# Altium PCB Arduino Cape.PcbDoc
Units mm, origin at the board's own origin, x right, y up, seen from the top; angles counter-clockwise.
Board outline 85 x 56.2 mm, 2 copper layers (Top Layer, Bottom Layer), stack 1.601 mm thick; 42 components, 53 nets, 199 pads, 77 vias.
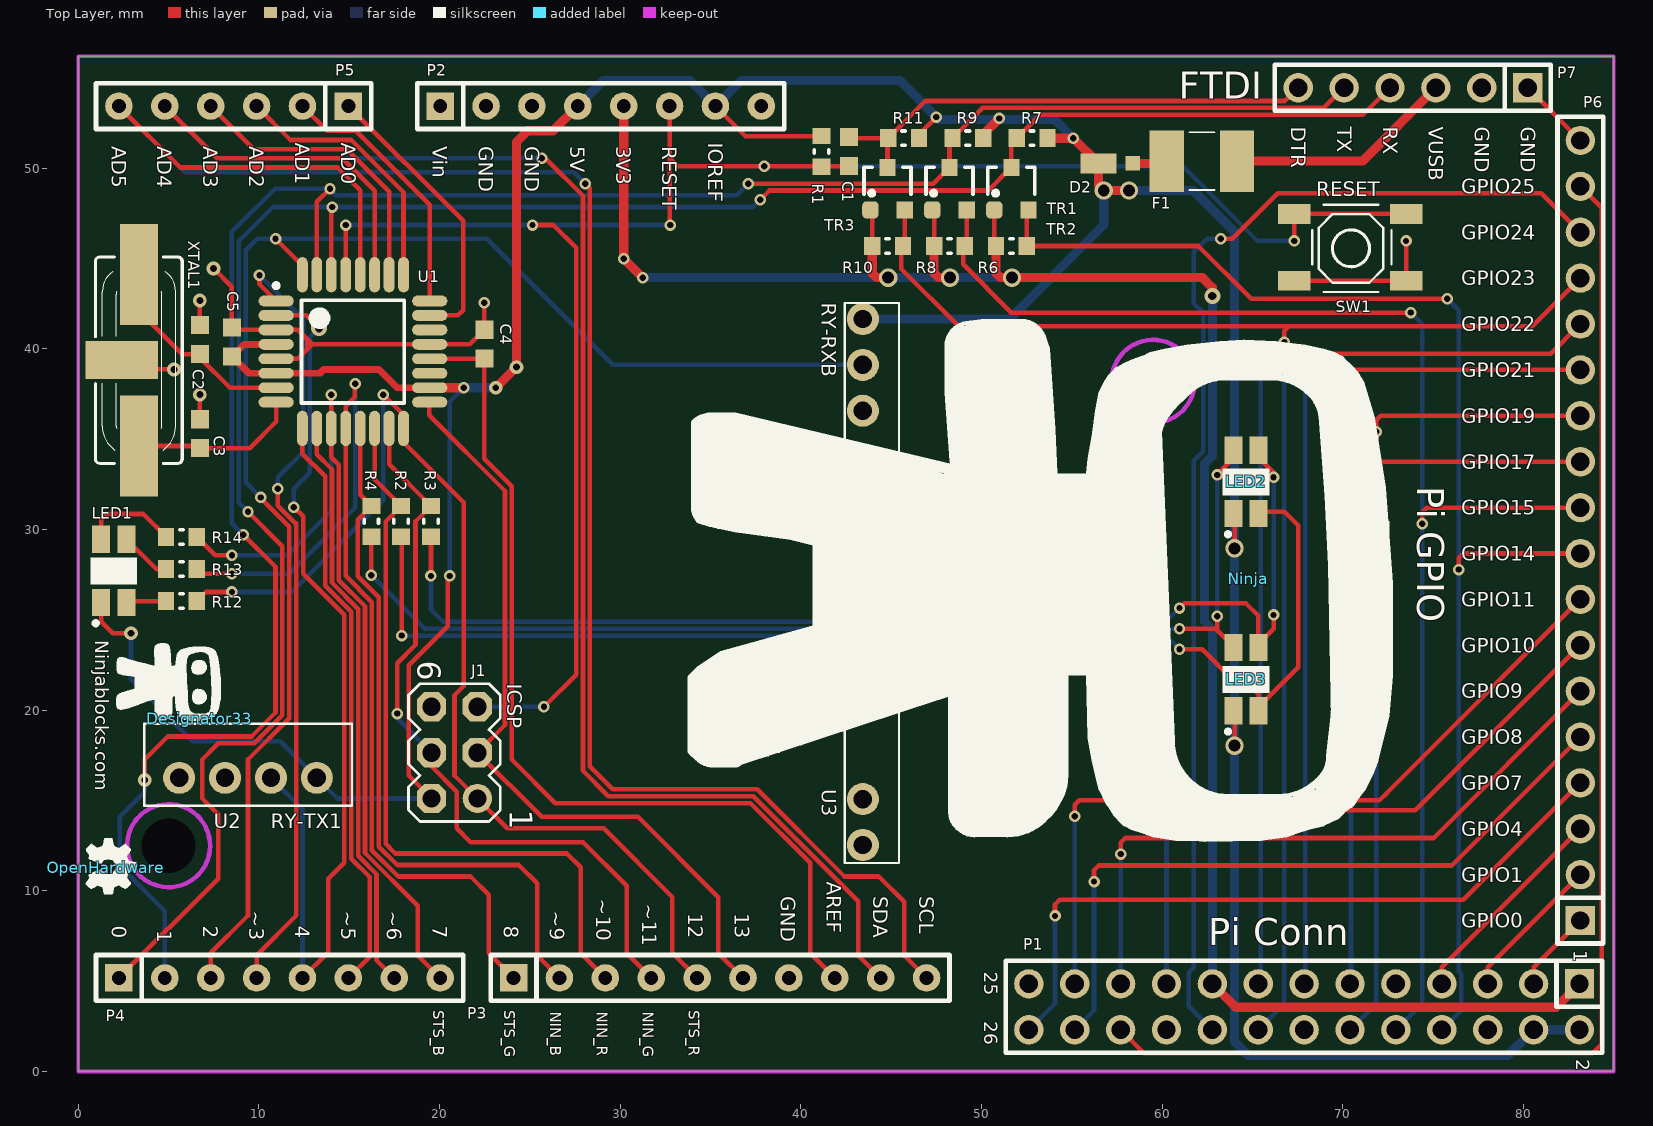
[diagram p0: Top Layer view]
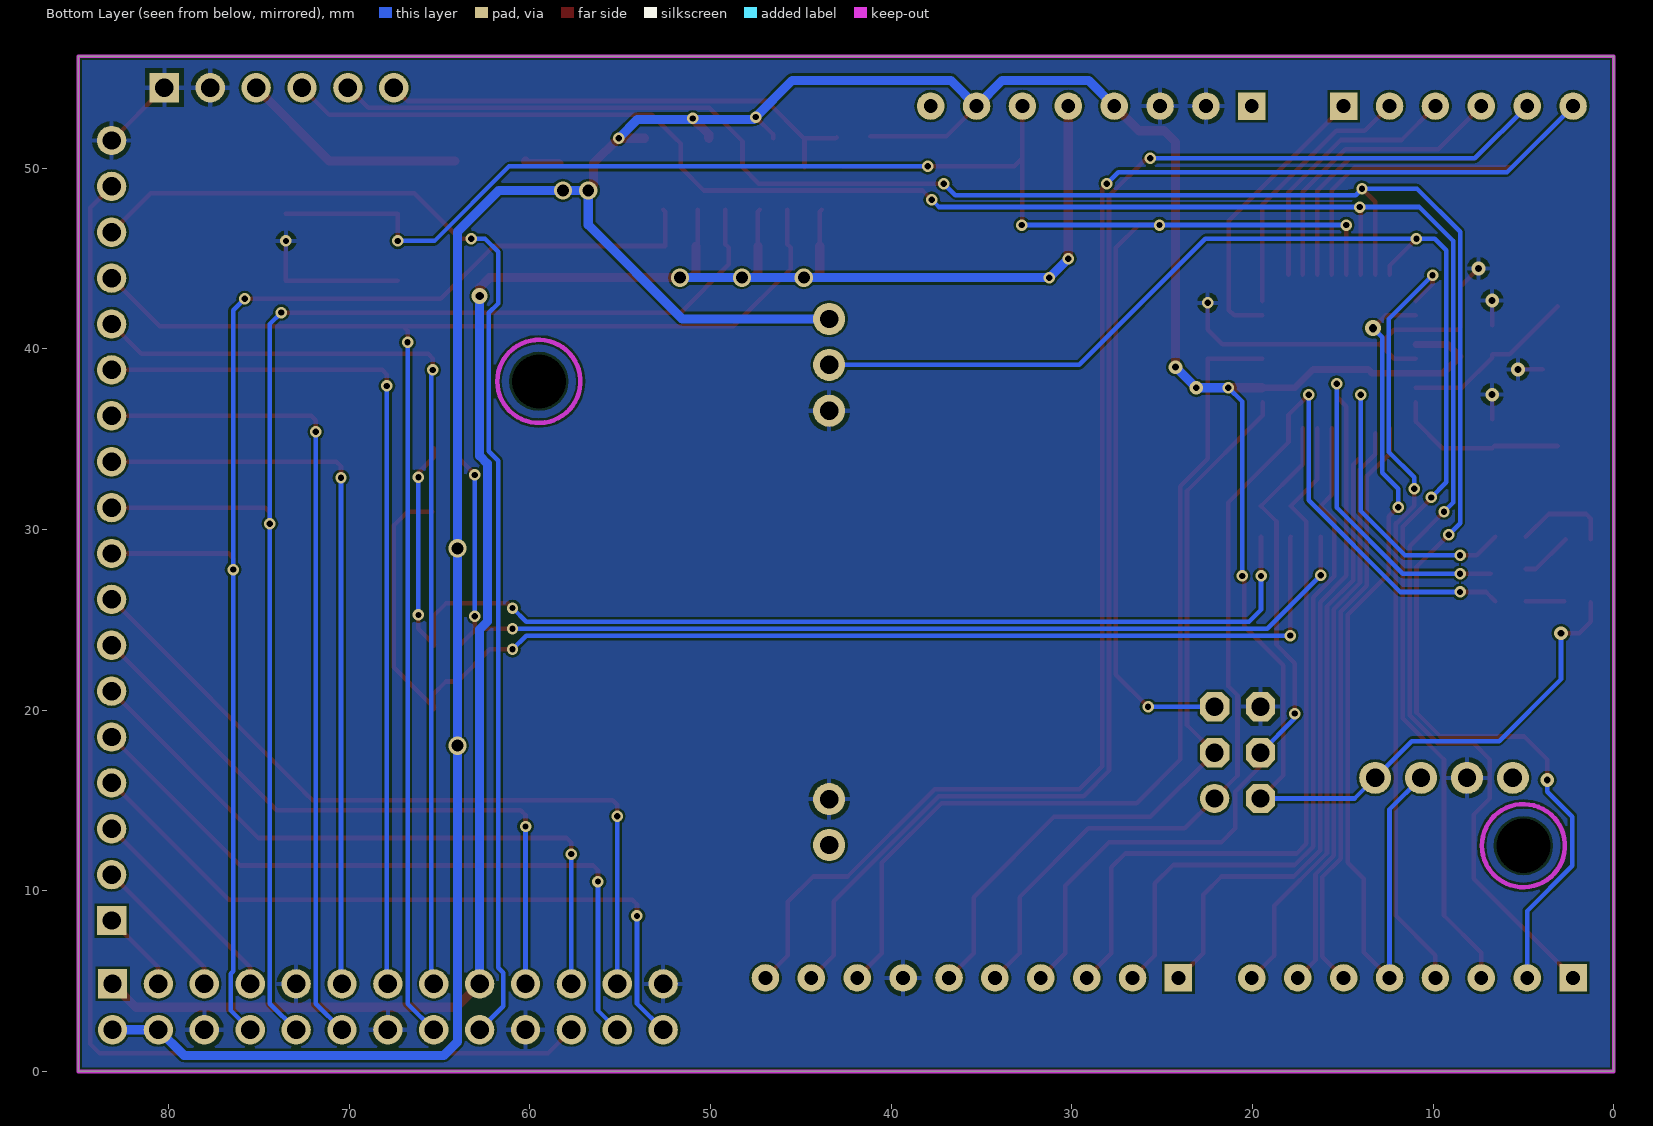
[diagram p1: Bottom Layer view, seen from below]

## Layer stack, top to bottom
Top Layer: signal copper 0.0356
Dielectric: core 1.53, FR-4, Dk 4.8
Bottom Layer: signal copper 0.0356

## Board outline
0,0 0,56.2 85,56.2 85,0

## Design rules (kind name [scope] priority, off if disabled: settings)
Clearance [All] p1: gap=0.127
HoleSize [All] p1: absolutevalues=TRUE maxlimit=3.048 minlimit=0.152 maxpercent=80.000 minpercent=20.000
MinimumSolderMaskSliver [All] p1: minsoldermaskwidth=0.173
PolygonConnect [All] p1: connectstyle=Relief reliefconductorwidth=0.254 reliefentries=4 polygonreliefangle="90 Angle" airgapwidth=0.254
RoutingVias [All] p1: holewidth=0.711 width=1.27 viastyle="Through Hole" minholewidth=0.711 minwidth=1.27 maxholewidth=0.711 maxwidth=1.27
SilkToSilkClearance [All] p1: silktosilkclearance=0.127
SilkToSolderMaskClearance SilkscreenOverComponentPads_Ninja [InComponent('Ninja')] p1: minsilkscreentomaskgap=0 clearancetoexposedcopper=TRUE
SilkToSolderMaskClearance SilkscreenOverComponentPads [IsPad] p2: minsilkscreentomaskgap=0.152 clearancetoexposedcopper=TRUE
SolderMaskExpansion [All] p1: expansion=0.102
Width [All] p1: maxlimit=1.016 minlimit=0.076 preferedwidth=0.127
24 further rules are at their usual default settings.

## Components (designator, comment, footprint, x,y, rotation, side; value= is the part's Value field where it differs from the comment)
C1 "100nF" CAPC1608N 42.672,50.927 r270 top
C2 "22p" CAPC1608N 6.731,40.513 r270 top
C3 "22p" CAPC1608N 6.731,35.306 r270 top
C4 "100nF" CAPC1608N 22.479,40.259 r270 top
C5 "100nF" CAPC1608N 8.509,40.386 r90 top
D2 "MSS1P2U" MICROSMP 56.483,50.265 r0 top
Designator33 "Comment" NinjaBlocks 6.731,19.558 r270 top
F1 "500mA" L1812 62.198,50.392 r180 top
J1 "HEADER" MA03-2 20.828,17.653 r90 top
LED1 "RGB LED" AVAGO_RGB_LED 1.967,27.714 r270 top
LED2 "RGB LED" AVAGO_RGB_LED 64.643,32.639 r270 top
LED3 "RGB LED" AVAGO_RGB_LED 64.643,21.717 r270 top
Ninja "Ninja_Logo_LRG" NinjaBlocks_LRG 64.77,27.305 r270 top
OpenHardware "OpenHardware_logo" OPENHARDWARE_LOGO 1.524,11.303 r270 top
P1 "Pi" SIP13X.2 83.1,4.85 r270 top
P2 "RECEPT" "Header 8x1 8.5mm" 20.034,53.44 r0 top
P3 "RECEPT" "Header 10x1 8.5mm" 24.098,5.18 r0 top
P4 "RECEPT" "Header 8x1 8.5mm" 2.254,5.18 r0 top
P5 "RECEPT" "Header 6x1 8.5mm" 14.954,53.44 r180 top
P6 "RECEPT" SIP18X.1 83.153,8.355 r270 top
P7 "HEADER" SIP6X.1 80.232,54.456 r270 top
R1 "10k" RESC1608N 41.148,50.927 r90 top
R2 "330R" RESC1608N 17.875,30.453 r270 top
R3 "330R" RESC1608N 19.526,30.453 r270 top
R4 "150R" RESC1608N 16.224,30.453 r90 top
R6 "10k" RESC1608N 51.657,45.693 r180 top
R7 "10k" RESC1608N 52.8,51.662 r0 top
R8 "10k" RESC1608N 48.228,45.693 r180 top
R9 "10k" RESC1608N 49.244,51.662 r0 top
R10 "10k" RESC1608N 44.799,45.693 r180 top
R11 "10k" RESC1608N 45.688,51.662 r0 top
R12 "330R" RESC1608N 5.715,26.035 r180 top
R13 "330R" RESC1608N 5.715,27.813 r180 top
R14 "150R" RESC1608N 5.715,29.591 r0 top
SW1 "SKQGADE010" ALPS_SMD_TAC_SWITCH 73.501,47.471 r180 top
TR1 "BSS138LT3G" SOT-23 51.657,48.868 r0 top
TR2 "BSS138LT3G" SOT-23 48.228,48.868 r0 top
TR3 "BSS138LT3G" SOT-23 44.799,48.868 r0 top
U1 "ATMEGA328P" 32A_M 15.208,39.851 r0 top
U2 "RY-TX1" TX1 5.588,16.256 r0 top
U3 "RY-RXB" RXB8 43.434,17.526 r270 top
XTAL1 "16.384MHz" HC49US-G 2.413,32.385 r270 top

## Footprints (in the part's own frame and the unit in brackets; to place one, negate y for a bottom-side part, rotate by r counter-clockwise, add the part's x,y. Pads: shape width x height; smd on the part's side, far side on the other; paste and mask are expansions set on the pad)
32A_M [mm] "Thin QFP, 32-Leads, Body 7x7mm, Pitch 0.8mm, IPC Low Density"
  oval 1.95x0.6 smd: 1(-4.25,2.8) 2(-4.25,2) 3(-4.25,1.2) 4(-4.25,0.4) 5(-4.25,-0.4) 6(-4.25,-1.2) 7(-4.25,-2) 8(-4.25,-2.8) 17(4.25,-2.8) 18(4.25,-2) 19(4.25,-1.2) 20(4.25,-0.4) 21(4.25,0.4) 22(4.25,1.2) 23(4.25,2) 24(4.25,2.8)
  oval 0.6x1.95 smd: 9(-2.8,-4.25) 10(-2,-4.25) 11(-1.2,-4.25) 12(-0.4,-4.25) 13(0.4,-4.25) 14(1.2,-4.25) 15(2,-4.25) 16(2.8,-4.25) 25(2.8,4.25) 26(2,4.25) 27(1.2,4.25) 28(0.4,4.25) 29(-0.4,4.25) 30(-1.2,4.25) 31(-2,4.25) 32(-2.8,4.25)
  silkscreen extent -4.37,-2.85 2.85,3.77, body extent -3.5,-3.5 3.5,3.5, height 1.2
ALPS_SMD_TAC_SWITCH [mm]
  rect 1.8x1.1 smd: 1(0,3.7) 2(6.2,3.7) 3(0,0) 4(6.2,0)
  silkscreen extent 0.8,-0.51 5.2,4.32
AVAGO_RGB_LED [mm]
  rect 1.5x1 smd: 1(1.75,-0.7) 2(1.75,0.7) 3(-1.75,0.7) 4(-1.75,-0.7)
  silkscreen extent -0.74,-1.3 3,1.3
CAPC1608N [mm] "Chip Capacitor, Body 1.6x0.8mm, IPC Medium Density"
  rect 1x1 smd: 1(-0.8,0) 2(0.8,0)
  body extent -0.87,-0.48 0.87,0.48, height 0.85
HC49US-G [mm]
  rect 5.6x2.1 smd: 1(-11.74,0.95) 3(-2.24,0.95)
  rect 2.1x4 smd: 2(-6.99,0)
  silkscreen extent -12.71,-1.46 -1.27,3.36
"Header 6x1 8.5mm" [mil] "Stackable 6 pin header"
  rect 60x60 hole 30: 1(0,0)
  round 60 hole 30: 2(100,0) 3(200,0) 4(300,0) 5(400,0) 6(500,0)
  silkscreen extent -50,-50 550,50, body extent -50,-50 550,50, height 335
"Header 8x1 8.5mm" [mil] "Stackable 8 pin header"
  rect 60x60 hole 30: 1(0,0)
  round 60 hole 30: 2(100,0) 3(200,0) 4(300,0) 5(400,0) 6(500,0) 7(600,0) 8(700,0)
  silkscreen extent -50,-50 750,50, body extent -50,-50 750,50, height 335
"Header 10x1 8.5mm" [mil] "Stackable 10 pin header"
  rect 60x60 hole 30: 1(0,0)
  round 60 hole 30: 2(100,0) 3(200,0) 4(300,0) 5(400,0) 6(500,0) 7(600,0) 8(700,0) 9(800,0) 10(900,0)
  silkscreen extent -50,-50 950,50, body extent -50,-50 950,50, height 335
L1812 [mm]
  rect 1.9x3.4 smd: 1(-1.95,0) 2(1.95,0)
  silkscreen extent -0.7,-1.6 0.7,1.6
MA03-2 [mil]
  round 64 hole 40: 1(-100,-50)
  oct 64x64 hole 40: 2(-100,50) 3(0,-50) 4(0,50) 5(100,-50) 6(100,50)
  silkscreen extent -150,-100 150,100
MICROSMP [mm]
  rect 0.8x0.8 smd: 1(1.9,0)
  rect 2x1.1 smd: 2(0,0)
NinjaBlocks [mm]
  silkscreen extent -4.16,-4.62 0.16,1.17
NinjaBlocks_LRG [mm]
  silkscreen extent -14.33,-31.02 14.52,7.99
OPENHARDWARE_LOGO [mm]
  silkscreen extent -1.6,-1.07 1.5,1.68
RESC1608N [mm] "Chip Resistor, Body 1.6x0.8mm, IPC Medium Density"
  rect 0.9x1 smd: 1(-0.85,0) 2(0.85,0)
  silkscreen extent -0.1,-0.4 0.1,0.4, body extent -0.85,-0.48 0.85,0.48, height 0.6
RXB8 [mil]
  round 70 hole 40: 1(-950,0) 2(-850,0) 3(-750,0) 4(96.46,0) 5(196.46,0)
  silkscreen extent -985,-39 236,79
SIP6X.1 [mil]
  rect 64x64 hole 40: 1(0,0)
  round 64 hole 40: 2(0,-100) 3(0,-200) 4(0,-300) 5(0,-400) 6(0,-500)
  silkscreen extent -50,-551 50,50
SIP13X.2 [mil]
  rect 64x64 hole 40: 1(0,0)
  round 64 hole 40: 2(100,0) 3(0,-100) 4(100,-100) 5(0,-200) 6(100,-200) 7(0,-300) 8(100,-300) 9(0,-400) 10(100,-400) 11(0,-500) 12(100,-500) 13(0,-600) 14(100,-600) 15(0,-700) 16(100,-700) 17(0,-800) 18(100,-800) 19(0,-900) 20(100,-900) 21(0,-1000) 22(100,-1000) 23(0,-1100) 24(100,-1100) 25(0,-1200) 26(100,-1200)
  silkscreen extent -50,-1250 150,50
SIP18X.1 [mil]
  rect 64x64 hole 40: 1(0,0)
  round 64 hole 40: 2(-100,0) 3(-200,0) 4(-300,0) 5(-400,0) 6(-500,0) 7(-600,0) 8(-700,0) 9(-800,0) 10(-900,0) 11(-1000,0) 12(-1100,0) 13(-1200,0) 14(-1300,0) 15(-1400,0) 16(-1500,0) 17(-1600,0) 18(-1700,0)
  silkscreen extent -1752,-50 50,50
SOT-23 [mm] "SOT-23; 3 Leads; Body 3.1 x 2.5 mm, inc. leads (LxW max)"
  rrect50% 0.9x0.95 smd: 1(-0.95,-1.175)
  rect 0.9x0.95 smd: 2(0.95,-1.175) 3(0,1.175)
  silkscreen extent -1.3,-0.37 1.3,1.18, body extent -1.53,-0.75 1.58,0.75, height 1.1
TX1 [mil]
  round 70 hole 40: 1(0,0) 2(100,0) 3(200,0) 4(300,0)
  silkscreen extent -76,-61 377,118

## Part data
C1 C4 C5: library part 1088, "CAP 100nF CER 50V 10% X7R 0603 SMD"
C2 C3: library part 2235, "CAP CER 22PF 5% 50V NP0 0603"
D2: library part 4286, "DIODE SCHOTTKY MSS1P2U 20V 1A"
F1: library part 4288, "PTC RESETTABLE 1812L050PR 15V 500mA 1812"
J1: library part 4300, "CONN HEADER 2 row 6pos 2.54mm spacing Vertical TH"
LED1 LED2 LED3: library part 4289, "LED HSMF-C118 20mA RGB SMD"
OpenHardware: "Open Hardware Logo"
P1: library part 4280
P2 P4: library part 4298, "CONN RECEPT Female 8pos 2.54mm spacing Vertical TH"
P3: library part 4297, "CONN RECEPT Female 10pos 2.54mm spacing Vertical TH"
P5: library part 4299, "CONN RECEPT Female 6pos 2.54mm spacing Vertical TH"
P6: library part 4302, "CONN RECEPT Female 18pos 2.54mm spacing Vertical TH"
P7: library part 4016, "CONN HEADER FTDI Connector 6pos 2.54mm spacing Vertical TH HDR1X6"
R1 R6 R7 R8 R9 R10 R11: library part 1382, "RES 10k OHM 1/10W 1% 0603 SMD"
R2 R3 R12 R13: library part 2087, "RES 330 OHM 1/10W 1% 0603 SMD"
R4 R14: library part 4119, "RES 150 OHM 0.1W 1% 0603 SMD"
SW1: library part 4290, "Switch Tactile SKQGADE010 SPST SMD"
TR1 TR2 TR3: library part 4287, "MOSFET N BSS138LT3G 50V 200mA SOT-23"
U1: library part 4292, "IC MCU ATMEGA328P 32K FLASH 32TQFP"
U2: library part 4294, "Module RF RY-TX1 Transmitting Module Through-hole"
U3: library part 4293, "Module RF RY-RXB Receiving Module Through-hole"
XTAL1: library part 4291, "XTAL 16.384MHz 18pF +/-20ppm tol HC49/USSMD"

## Free pads (board coordinates)
  round 2 hole 3 unplated: 0(5,12.5)
  round 0 hole 3 unplated: ""(59.5,38.2)

## Via types
v1: diameter 0.635, hole 0.35, Top Layer to Bottom Layer, 60 vias
v2: diameter 0.762, hole 0.381, Top Layer to Bottom Layer, 8 vias
v3: diameter 1.016, hole 0.66, Top Layer to Bottom Layer, 7 vias
v4: diameter 0.889, hole 0.457, Top Layer to Bottom Layer, 2 vias

## Nets (pads, with @x,y where several pads share a name; then routed paths per layer and width w, separated by ;. In a path a pad name is that pad's centre, name@x,y a point inside that pad or via, vN(x,y) a via of type N, cw(c..) or ccw(c..) an arc to the next point about the centre after c; other vN are vias at no path point)
3V3: P1.1 P1.17 P2.5 R6.2 R8.2 R10.2 TR1.1 TR2.1 TR3.1 | length 116.9
  Top Layer w0.254: TR3.1 43.949,47.593 R10.2 ; TR2.1 47.378,47.593 R8.2 ; R6.2@50.707,45.793 TR1.1
  Top Layer w0.508: P2.5 v1(30.194,44.99) v1(31.242,43.942) ; R10.2 43.949,44.189 44.196,43.942 v3(44.831,43.942) ; R8.2 47.378,44.189 47.625,43.942 v3(48.26,43.942) ; R6.2 50.807,44.189 51.054,43.942 v3(51.689,43.942) 62.23,43.942 62.78,43.392 v4(62.78,42.926) ; P1.17 64.074,3.556 81.806,3.556 P1.1
  Bottom Layer w0.508: v1(30.194,44.99) v1(31.242,43.942) v3(44.831,43.942) v3(48.26,43.942) v3(51.689,43.942) ; P1.17 62.78,24.473 62.351,24.903 62.351,33.649 62.78,34.078 v4(62.78,42.926)
5V: C5.1 D2.2 J1.2 LED1.1 LED2.1 LED3.1 P1.2 P1.4 P2.4 P2.7 R1.2 R7.2 R9.2 R11.2 U1.4 U1.6 U1.18 U2.4 U3.1 | length 228.9
  Top Layer w0.254: LED1.1 1.267,24.895 1.905,24.257 2.667,24.257 v2@2.921,24.511 ; J1.2 18.288,16.383 18.288,22.479 20.447,24.638 20.447,27.305 v1(20.574,27.432) ; P2.7 36.937,51.777 R1.2 ; R11.2 46.538,51.872 v1(47.498,52.832) ; R9.2 R9.2@50.138,51.662 ; v3@63.849,29.31 v3@63.905,29.366 ; LED3.1@63.911,20.067 64.008,19.97 v3(64.008,18.034) ; LED2.1@63.911,30.989 64.008,30.892 v3(64.008,28.956)
  Top Layer w0.381: U1.4 9.174,40.251 C5.1 9.444,38.651 U1.6 13.378,38.651 13.589,38.862 16.637,38.862 17.648,37.851 U1.18
  Top Layer w0.508: U1.18 v1(21.336,37.851) ; v2(23.114,37.846) v2(24.257,38.989) 24.257,51.435 24.892,52.07 26.284,52.07 P2.4 ; R9.2 50.094,51.872 v1(50.978,52.756) ; R7.2 v1(55.086,51.662) D2.2 56.483,49.054 v3(56.769,48.768) v3(58.166,48.768)
  Bottom Layer w0.254: v2(2.921,24.257) 2.921,21.717 6.35,18.288 11.176,18.288 U2.4 14.351,15.113 J1.2 ; v1(20.574,27.432) 20.574,37.089 v1(21.336,37.851)
  Bottom Layer w0.508: v1(21.336,37.851) 23.119,37.851 v2(24.257,38.989) ; P2.4 29.078,54.864 33.85,54.864 P2.7 36.698,54.864 45.466,54.864 v1(47.498,52.832) 47.625,52.705 54.043,52.705 v1(55.086,51.662) ; U3.1 51.562,41.656 56.769,46.863 v3(56.769,48.768) v3(58.166,48.768) 61.722,48.768 64.008,46.482 v3(64.008,28.956) v3(64.008,18.034) 64.008,1.651 64.77,0.889 79.139,0.889 P1.4 P1.2
AD0: P5.1 U1.23 | length 15.9
  Top Layer w0.254: P5.1 21.304,47.09 21.304,42.137 21.018,41.851 U1.23
AD1: P5.2 U1.24 | length 14.6
  Top Layer w0.254: P5.2 13.784,52.07 15.367,52.07 19.458,47.979 U1.24
AD2: P5.3 U1.25 | length 14.7
  Top Layer w0.254: P5.3 11.752,51.562 15.113,51.562 18.008,48.667 U1.25
AD3: P5.4 U1.26 | length 16.4
  Top Layer w0.254: P5.4 9.72,51.054 14.859,51.054 17.208,48.705 U1.26
AREF: C4.2 P3.8 U1.20 | length 51.7
  Top Layer w0.254: U1.20 19.466,39.459 C4.2 22.479,33.909 24.003,32.385 24.003,17.272 26.416,14.859 37.211,14.859 40.513,11.557 40.513,6.545 P3.8
B2_LED: P4.8 R14.2 U1.11 | length 50.1
  Top Layer w0.254: R14.2 7.581,28.575 v1(8.509,28.575) ; v1(14.008,37.465) U1.11 14.008,33.998 14.427,33.579 14.427,27.203 15.875,25.755 15.875,12.096 18.796,9.175 18.796,6.418 P4.8
  Bottom Layer w0.254: v1(8.509,28.575) 11.557,28.575 14.008,31.026 v1(14.008,37.465)
B_LED: P3.2 R4.2 U1.13 | length 39.6
  Top Layer w0.254: U1.13 15.608,31.919 R4.2 15.47,30.549 15.47,27.41 16.637,26.243 16.637,12.446 17.653,11.43 24.384,11.43 25.4,10.414 25.4,6.418 P3.2
DTR: C1.1 P7.6 R11.1 TR3.3 | length 27.3
  Top Layer w0.254: C1.1@43.021,51.7 43.059,51.662 R11.1 ; TR3.3 44.799,51.623 R11.1 ; P7.6 66.797,53.721 46.897,53.721 R11.1
G2_LED: P3.1 R13.1 U1.12 | length 56.2
  Top Layer w0.254: R13.1@6.819,27.559 v1(8.509,27.559) ; v1@15.316,38.049 15.316,37.338 14.808,36.83 U1.12 14.808,27.432 16.256,25.984 16.256,12.254 17.715,10.795 21.717,10.795 22.733,9.779 22.733,6.545 P3.1
  Bottom Layer w0.254: v1(8.509,27.559) 11.684,27.559 15.342,31.217 v1(15.342,38.075)
G_LED: J1.4 P3.4 R3.1 U1.15 | length 41.6
  Top Layer w0.254: U1.15 17.208,33.621 R3.1 18.669,30.446 18.669,23.622 17.653,22.606 v1(17.653,19.812) ; J1.4 19.558,16.891 20.955,15.494 20.955,13.462 21.717,12.7 27.94,12.7 30.353,10.287 30.353,6.545 P3.4
  Bottom Layer w0.254: v1(17.653,19.812) 17.653,19.558 J1.4
GND: C2.1 C3.1 C4.1 C5.2 J1.6 P1.6 P1.9 P1.14 P1.20 P1.25 P2.2 P2.3 P3.7 P6.18 P7.1 P7.2 SW1.1 SW1.2 U1.3 U1.5 U1.21 U2.2 U3.3 U3.4 XTAL1.2 | length 38.8
  Top Layer w0.254: XTAL1.2@3.937,38.862 v2(5.296,38.862) ; C3.1 v2(6.731,37.465) ; C2.1 v2(6.731,42.672) ; v2(7.493,44.45) 8.509,43.434 C5.2 8.644,41.051 U1.3 12.162,41.051 12.962,40.251 ; U1.5 12.162,39.451 12.962,40.251 ; v1(22.479,42.545) C4.1 21.671,40.251 U1.21 12.962,40.251 ; SW1.2 SW1.1 v1(73.501,45.974) ; P7.1 P6.18
GPIO0: P1.3 P6.1 | length 4.6
  Top Layer w0.254: P1.3 80.56,5.762 P6.1
GPIO1: P1.5 P6.2 | length 8.2
  Top Layer w0.254: P1.5 78.02,5.762 P6.2
GPIO4: P1.7 P6.3 | length 11.8
  Top Layer w0.254: P1.7 75.48,5.762 P6.3
GPIO7: P1.26 P6.4 | length 39.4
  Top Layer w0.254: v1(54.07,8.609) 54.07,9.244 54.324,9.498 76.676,9.498 P6.4
  Bottom Layer w0.254: P1.26 54.07,3.76 v1(54.07,8.609)
GPIO8: P1.24 P6.5 | length 39.3
  Top Layer w0.254: v1(56.229,10.514) 56.229,11.149 56.483,11.403 76.041,11.403 P6.5
  Bottom Layer w0.254: P1.24 56.229,3.379 v1(56.229,10.514)
GPIO9: P1.21 P6.6 | length 36.7
  Top Layer w0.254: v1(57.7,12.038) 57.7,12.673 57.954,12.927 75.025,12.927 P6.6
  Bottom Layer w0.254: P1.21 v1(57.7,12.038)
GPIO10: P1.19 P6.7 | length 35.9
  Top Layer w0.254: v1(60.24,13.562) 60.24,14.197 60.494,14.451 74.009,14.451 P6.7
  Bottom Layer w0.254: P1.19 v1@60.24,13.308
GPIO11: P1.23 P6.8 | length 43.3
  Top Layer w0.254: v1(55.16,14.123) 55.16,14.758 55.414,15.012 72.03,15.012 ; 72.485,15.467 72.03,15.012 ; P6.8 72.03,15.012
  Bottom Layer w0.254: P1.23 v1(55.16,14.123)
GPIO17: P1.11 P6.11 | length 41.5
  Top Layer w0.254: v1(70.453,32.866) 70.453,33.501 70.707,33.755 P6.11
  Bottom Layer w0.254: P1.11 70.453,4.903 v1(70.453,32.866)
GPIO18: P1.12 P6.12 | length 45.7
  Top Layer w0.254: v1(71.85,35.406) 71.85,36.041 72.104,36.295 P6.12
  Bottom Layer w0.254: P1.12 71.85,3.76 v1(71.85,35.406)
GPIO21: P1.13 P6.13 | length 49.1
  Top Layer w0.254: v1(67.913,37.946) 67.913,38.581 68.167,38.835 P6.13
  Bottom Layer w0.254: P1.13 67.913,4.903 v1(67.913,37.946)
GPIO22: P1.15 P6.14 | length 53.6
  Top Layer w0.254: v1(65.373,38.835) 65.373,39.47 65.627,39.724 81.502,39.724 P6.14
  Bottom Layer w0.254: P1.15 P1.15@65.468,4.998 ; v1(65.373,38.835) 65.468,38.74 P1.15@65.468,4.998 ; P1.15@65.659,5.189 P1.15@65.468,4.998
GPIO24: P1.18 P6.16 | length 67.8
  Top Layer w0.254: v1(63.246,46.101) 63.881,46.101 66.394,48.614 80.994,48.614 P6.16
  Bottom Layer w0.254: P1.18 61.468,3.622 61.468,5.461 61.754,5.747 61.754,33.814 62.272,34.332 62.272,41.995 61.754,42.513 61.754,45.371 62.484,46.101 v1(63.246,46.101)
GPIO25: P1.22 P6.17 | length 75.6
  Top Layer w0.254: P1.22 58.994,1.016 83.82,1.016 84.328,1.524 84.328,47.82 P6.17
  Bottom Layer w0.254: P1.22 P1.22@57.7,2.582
LV_DTR: P1.16 P6.15 R10.1 TR3.2 | length 83
  Top Layer w0.254: TR3.2 45.749,45.793 R10.1 45.561,45.605 45.561,44.423 48.736,41.248 67.024,41.248 ; v1(66.77,40.359) 66.77,40.994 67.024,41.248 ; P6.15 80.486,41.248 67.024,41.248
  Bottom Layer w0.254: P1.16 66.77,3.76 v1(66.77,40.359)
NetC2_2: C2.2 U1.7 XTAL1.1 | length 9.8
  Top Layer w0.254: XTAL1.1@3.109,42.357 5.753,39.713 C2.2 6.731,39.515 8.4,37.846 U1.7@10.958,37.846
NetC3_2: C3.2 U1.8 XTAL1.3 | length 9.4
  Top Layer w0.254: XTAL1.3@3.109,34.625 C3.2@6.604,34.625 ; C3.2 9.487,34.506 10.958,35.977 U1.8
NetD2_1: D2.1 F1.2 | length 1.9
  Top Layer w0.508: D2.1 60.121,50.265 F1.2
NetLED1_2: LED1.2 R12.2 | length 2.1
  Top Layer w0.254: LED1.2@2.738,26.035 R12.2
NetLED1_3: LED1.3 R13.2 | length 2.9
  Top Layer w0.254: LED1.3 4.318,27.813 R13.2
NetLED1_4: LED1.4 R14.1 | length 5.4
  Top Layer w0.254: LED1.4 1.267,30.604 1.524,30.861 3.595,30.861 R14.1
NetLED2_2: LED2.2 LED3.2 R2.2 | length 68.7
  Top Layer w0.254: R2.2 17.907,29.571 v1(17.907,24.13) ; v1(60.96,23.368) 62.219,23.368 63.997,21.59 64.643,21.59 65.343,20.89 LED3.2@65.343,20.186 ; LED3.2@65.305,20.148 LED3.2@65.311,20.154 ; LED3.2@65.311,20.067 LED3.2@65.311,20.154 ; LED3.2@65.311,20.276 LED3.2@65.311,20.154 ; LED3.2@65.343,20.094 LED3.2@65.343,20.186 ; LED2.2@65.405,30.988 66.77,30.988 67.532,30.226 67.532,22.375 LED3.2@65.343,20.186 ; LED3.2@65.311,20.154 LED3.2@65.343,20.186
  Bottom Layer w0.254: v1(17.907,24.13) 60.198,24.13 v1(60.96,23.368)
NetLED2_3: LED2.3 LED3.3 R3.2 | length 64.5
  Top Layer w0.254: v1(19.526,27.432) R3.2 ; v1(60.96,25.654) 61.214,25.908 64.643,25.908 65.311,25.24 LED3.3@65.311,23.654 ; LED3.3@65.305,23.648 LED3.3@65.311,23.654 ; LED3.3@65.311,23.567 LED3.3@65.311,23.654 ; LED2.3@65.311,34.489 65.311,34.003 66.167,33.147 v1(66.167,32.893) ; v1(66.167,25.273) 66.167,24.51 LED3.3@65.311,23.654
  Bottom Layer w0.254: 19.526,26.956 v1(19.526,27.432) 19.526,25.559 20.193,24.892 60.198,24.892 v1(60.96,25.654) ; v1(66.167,25.273) v1(66.167,32.893)
NetLED2_4: LED2.4 LED3.4 R4.1 | length 61.5
  Top Layer w0.254: v1(16.224,27.464) R4.1 ; v1(60.96,24.511) 62.967,24.511 63.049,24.429 ; v1(63.049,25.192) 63.049,24.429 ; v1@63.246,32.893 63.222,32.893 63.049,33.066 LED2.4@63.905,33.922 ; LED3.4@63.905,23.573 63.049,24.429
  Bottom Layer w0.254: v1(16.224,27.464) 19.177,24.511 v1(60.96,24.511) ; v1(63.049,25.192) v1(63.049,33.02)
PD3: P4.4 U1.1 | length 43.6
  Top Layer w0.254: P4.4 9.874,6.445 12.065,8.636 12.065,30.353 12.019,30.353 11.049,31.323 v1(11.049,32.258) ; v1(10.033,44.069) 10.033,43.576 U1.1
  Bottom Layer w0.254: v1(10.033,44.069) 12.446,41.656 12.446,34.29 11.049,32.893 v1(11.049,32.258)
PD5: P4.6 U1.9 | length 32.4
  Top Layer w0.254: U1.9 12.408,34.201 13.665,32.944 13.665,26.887 15.113,25.439 15.113,11.78 16.129,10.764 16.129,6.355 P4.6
PD6: P4.7 U1.10 | length 32.3
  Top Layer w0.254: U1.10@13.208,35.34 13.208,34.163 14.046,33.325 14.046,27.045 15.494,25.597 15.494,11.938 16.51,10.922 16.51,6.164 P4.7 P4.7@17.172,5.18
PI_RXD: P1.10 P6.10 R8.1 TR2.2 | length 79
  Top Layer w0.254: TR2.2 49.178,45.793 R8.1 48.99,45.605 48.99,44.677 51.657,42.01 v1(73.755,42.01) ; v1(74.39,30.326) 74.39,30.961 74.644,31.215 P6.10
  Bottom Layer w0.254: P1.10 74.39,3.76 v1(74.39,30.326) 74.39,41.375 v1(73.755,42.01)
PI_TXD: P1.8 P6.9 R6.1 TR1.2 | length 75.2
  Top Layer w0.254: TR1.2 52.507,47.593 R6.1 62.003,45.693 64.924,42.772 v1(75.787,42.772) ; v1(76.422,27.786) 76.422,28.421 76.676,28.675 P6.9
  Bottom Layer w0.254: P1.8 76.547,3.377 76.547,5.417 76.422,5.542 v1(76.422,27.786) 76.422,42.137 v1(75.787,42.772)
R2_LED: J1.1 P3.5 R12.1 U1.16 | length 61.5
  Top Layer w0.254: R12.1 7.073,26.543 v1(8.509,26.543) ; v1(16.891,37.465) 18.008,36.348 U1.16 18.008,34.824 21.336,31.496 21.336,21.336 20.828,20.828 20.828,16.383 J1.1 23.749,13.462 29.083,13.462 32.893,9.652 32.893,6.545 P3.5
  Bottom Layer w0.254: v1(8.509,26.543) 11.811,26.543 16.891,31.623 v1(16.891,37.465)
R_LED: P3.3 R2.1 U1.14 | length 42
  Top Layer w0.254: U1.14 16.408,32.77 R2.1 17.018,30.446 17.018,12.604 17.557,12.065 27.051,12.065 27.813,11.303 27.813,6.545 P3.3
RESET: C1.2 J1.5 P2.6 R1.1 SW1.3 SW1.4 U1.29 | length 108.7
  Top Layer w0.254: U1.29 v1(14.808,46.855) ; v1(25.146,46.855) 26.297,46.855 27.559,45.593 27.559,21.971 v1(25.781,20.193) ; v1@32.734,46.863 32.734,50.546 ; P2.6 32.734,50.546 ; C1.2@42.672,50.1 v1(37.973,50.1) 33.18,50.1 32.734,50.546 ; v1(67.31,45.974) 67.31,47.462 SW1.4 SW1.3
  Bottom Layer w0.254: v1(14.808,46.855) v1(32.766,46.855) ; J1.5 v1(25.781,20.193) ; v1@38.227,50.1 61.152,50.1 65.278,45.974 v1(67.31,45.974)
RFA: P4.3 U1.32 U3.2 | length 83
  Top Layer w0.254: P4.3 7.334,6.572 9.398,8.636 9.398,17.272 11.684,19.558 11.684,30.149 10.109,31.724 v1(10.109,31.775) ; v1(10.922,46.101) 12.408,44.615 U1.32
  Bottom Layer w0.254: v1(10.109,31.775) 9.271,32.614 9.271,45.466 9.906,46.101 v1(10.922,46.101) 22.606,46.101 29.591,39.116 U3.2
RFB: P4.5 U1.2 U2.3 | length 53.1
  Top Layer w0.254: U1.2 12.632,41.851 v4(13.335,41.148) ; v1(11.938,31.242) 12.446,30.734 12.446,27.559 14.732,25.273 14.732,11.557 13.843,10.668 13.843,6.609 P4.5
  Bottom Layer w0.254: U2.3 12.414,14.51 P4.5 ; v1(11.938,31.242) 11.938,32.258 12.827,33.147 12.827,40.64 v4(13.335,41.148)
RX: P4.1 P7.4 R7.1 TR1.3 U1.30 | length 119.2
  Top Layer w0.254: P4.1 7.747,10.673 7.747,14.224 6.858,15.113 6.858,17.272 7.747,18.161 9.748,18.161 11.303,19.716 11.303,29.083 v1(9.398,30.988) ; U1.30 14.008,47.795 v1(14.065,47.852) ; v1(37.759,48.26) 38.267,48.768 50.382,48.768 TR1.3 51.657,51.369 R7.1 53.247,52.959 71.115,52.959 P7.4
  Bottom Layer w0.254: v1(9.398,30.988) 8.89,31.496 8.89,45.974 10.768,47.852 v1(14.065,47.852) 37.351,47.852 v1(37.759,48.26)
SCK: J1.3 P3.6 U1.17 | length 43.5
  Top Layer w0.254: U1.17@19.431,37.051 19.431,36.322 23.622,32.131 23.622,19.177 J1.3 25.654,14.097 30.988,14.097 35.433,9.652 35.433,6.545 P3.6
SCL: P3.10 P5.6 U1.28 | length 105.8
  Top Layer w0.254: P5.6 5.656,50.038 14.351,50.038 15.608,48.781 U1.28 ; v1(28.067,49.149) 28.321,48.895 28.321,16.891 29.591,15.621 37.592,15.621 42.418,10.795 44.323,10.795 45.72,9.398 45.72,6.418 P3.10 P3.10@46.958,5.815
  Bottom Layer w0.254: P5.6 5.91,49.784 27.432,49.784 v1(28.067,49.149)
SDA: P3.9 P5.5 U1.27 | length 98.2
  Top Layer w0.254: P5.5 7.688,50.546 14.605,50.546 16.408,48.743 U1.27 ; v1(25.654,50.546) 25.862,50.546 27.94,48.468 27.94,16.637 29.337,15.24 37.369,15.24 43.18,9.429 43.18,6.418 P3.9
  Bottom Layer w0.254: P5.5 7.688,50.546 v1(25.654,50.546)
TX: P4.2 P7.5 R9.1 TR2.3 U1.31 | length 120.7
  Top Layer w0.254: v2(3.683,16.129) 3.683,17.272 4.953,18.542 9.59,18.542 10.922,19.874 10.922,27.94 v1(9.144,29.718) ; U1.31 13.208,48.138 v1(13.938,48.868) ; v1(37.084,49.149) 47.334,49.149 TR2.3 48.228,51.496 R9.1 50.072,53.34 68.956,53.34 P7.5
  Bottom Layer w0.254: v2(3.683,16.129) 3.683,15.494 2.296,14.107 2.296,11.38 4.794,8.882 P4.2 ; v1(9.144,29.718) 8.509,30.353 8.509,46.482 10.895,48.868 v1(13.938,48.868) 14.292,48.514 36.449,48.514 v1(37.084,49.149)
VUSB: F1.1 P7.3 | length 12.7
  Top Layer w0.508: F1.1 71.088,50.392 P7.3
pads on no net: P2.1 P2.8 U1.19 U1.22 U2.1 U3.5

## Polygon pours and split planes (outlines as drawn)
GND on Bottom Layer "Bottom_GND" (solid, pour order 2): 0,56.2 85,56.2 85,0 0,0

## Keep-outs
Keep-Out Layer:
  circle w0.254: c59.5,38.2 r2.3
  circle w0.254: c5,12.5 r2.3
  lines w0.2: 0,0 85,0 85,56.2 0,56.2 0,0

## Other copper
Top Layer:
  region net GND: 12.962,40.251 12.573,40.64 12.573,39.894 12.589,39.878

## Silkscreen, mask and mechanical layers (free items; w line width, h text height)
Top Overlay:
  text "FTDI" at 60.909,53.848 h1.5
  text "DTR" at 67.151,52.297 h0.81 r270
  text "TX" at 69.691,52.297 h0.81 r270
  text "RX" at 72.231,52.297 h0.81 r270
  text "VUSB" at 74.771,52.297 h0.81 r270
  text "GND" at 77.311,52.297 h0.81 r270
  text "GND" at 79.851,52.297 h0.81 r270
  text "AD1" at 12.008,51.408 h0.81 r270
  text "AD0" at 14.548,51.408 h0.81 r270
  text "IOREF" at 34.868,51.408 h0.81 r270
  text "AD5" at 1.848,51.228 h0.81 r270
  text "AD4" at 4.388,51.228 h0.81 r270
  text "AD3" at 6.928,51.228 h0.81 r270
  text "AD2" at 9.468,51.228 h0.81 r270
  text "Vin" at 19.628,51.228 h0.81 r270
  text "GND" at 22.168,51.228 h0.81 r270
  text "GND" at 24.708,51.228 h0.81 r270
  text "5V" at 27.248,51.228 h0.81 r270
  text "3V3" at 29.788,51.228 h0.81 r270
  text "RESET" at 32.328,51.228 h0.81 r270
  text "GPIO25" at 76.549,48.589 h0.81
  text "RESET" at 68.533,48.457 h0.81
  text "GPIO24" at 76.549,46.049 h0.81
  text "GPIO23" at 76.549,43.509 h0.81
  text "GPIO22" at 76.549,40.969 h0.81
  text "GPIO21" at 76.549,38.429 h0.81
  text "GPIO19" at 76.549,35.889 h0.81
  text "GPIO17" at 76.549,33.349 h0.81
  text "Pi GPIO" at 74.117,32.385 h1.5 r270
  text "GPIO15" at 76.549,30.809 h0.81
  text "GPIO14" at 76.549,28.269 h0.81
  text "GPIO11" at 76.549,25.729 h0.81
  text "GPIO10" at 76.549,23.189 h0.81
  text "ICSP" at 23.749,21.463 h0.81 r270
  text "GPIO9" at 76.549,20.649 h0.81
  text "GPIO8" at 76.549,18.109 h0.81
  text "GPIO7" at 76.549,15.569 h0.81
  text "GPIO4" at 76.549,13.029 h0.81
  text "AREF" at 41.442,10.514 h0.81 r270
  text "GPIO1" at 76.549,10.489 h0.81
  text "GND" at 38.887,9.701 h0.81 r270
  text "SDA" at 43.997,9.701 h0.81 r270
  text "SCL" at 46.552,9.701 h0.81 r270
  text "~10" at 28.669,9.566 h0.81 r270
  text "~11" at 31.223,9.295 h0.81 r270
  text "~3" at 9.468,8.889 h0.81 r270
  text "~5" at 14.548,8.889 h0.81 r270
  text "~6" at 17.088,8.889 h0.81 r270
  text "~9" at 26.114,8.889 h0.81 r270
  text "12" at 33.778,8.754 h0.81 r270
  text "13" at 36.333,8.753 h0.81 r270
  text "0" at 1.848,8.076 h0.81 r270
  text "2" at 6.928,8.076 h0.81 r270
  text "4" at 12.008,8.076 h0.81 r270
  text "7" at 19.628,8.076 h0.81 r270
  text "8" at 23.559,8.076 h0.81 r270
  text "GPIO0" at 76.549,7.949 h0.81
  text "1" at 4.388,7.806 h0.81 r270
  text "Pi Conn" at 62.56,6.985 h1.5
  text "1" at 82.779,6.706 h0.75 r270
  text "25" at 50.14,5.512 h0.75 r270
  text "STS_B" at 19.654,3.402 h0.6 r270
  text "STS_G" at 23.585,3.402 h0.6 r270
  text "STS_R" at 33.804,3.402 h0.6 r270
  text "NIN_B" at 26.14,3.302 h0.6 r270
  text "NIN_R" at 28.695,3.302 h0.6 r270
  text "NIN_G" at 31.249,3.302 h0.6 r270
  text "26" at 50.14,2.794 h0.75 r270
  text "2" at 82.931,0.686 h0.75 r270
Mechanical 1:
  the board outline again, w0.2
Mechanical 2:
  lines w0.203: -4.302,-95.994 99.198,-95.994 ; -4.302,-95.885 -4.302,-71.994 99.198,-71.994 99.198,-96.012 ; -4.302,-89.994 99.198,-89.994 ; -4.302,-83.994 99.198,-83.994 ; -4.302,-77.994 99.198,-77.994 ; 73.698,-89.994 73.698,-83.994
  text "COMPANY:" at -2.802,-76.494 h3
  text "LX DESIGN HOUSE" at 19.698,-76.494 h2.8
  text "BOARD NAME:" at -2.802,-82.494 h3
  text ".Pcb_File_Name_No_Path" at 28.697,-82.494 h3
  text "BOARD NO:" at -2.802,-88.494 h3
  text ".Pcb_File_Name_No_Path" at 24.197,-88.494 h3
  text "REV:" at 75.198,-88.494 h3
  text "2.0" at 88.698,-88.494 h3
  text ".PRINT_DATE" at 15.443,-94.615 h3
  text "DATE :" at -2.802,-94.652 h3
Mechanical 5:
  region: -195.047,120.533 -195.234,120.561 -195.234,120.506
Drill Drawing:
  lines w0: -309.745,52.501 -309.745,60.251 -301.745,60.251 -301.745,52.501 -309.745,52.501 ; -308.424,-159.311 -308.424,-151.561 -300.424,-151.561 -300.424,-159.311 -308.424,-159.311 ; -84.118,-193.907 -84.118,-186.157 -76.118,-186.157 -76.118,-193.907 -84.118,-193.907
  lines w0.127: -317.975,-65.713 -317.975,-59.363 -314.8,-59.363 -314.8,-56.188 -311.625,-62.538 -314.8,-68.888 -314.8,-65.713 -317.975,-65.713 ; -36.181,-259.167 -29.831,-255.992 -23.481,-259.167 -26.656,-259.167 -26.656,-262.342 -33.006,-262.342 -33.006,-259.167 -36.181,-259.167 ; -36.181,134.183 -33.006,134.183 -33.006,137.358 -26.656,137.358 -26.656,134.183 -23.481,134.183 -29.831,131.008 -36.181,134.183 ; 251.963,-62.538 255.138,-68.888 255.138,-65.713 258.313,-65.713 258.313,-59.363 255.138,-59.363 255.138,-56.188 251.963,-62.538
  lines w0.203: -97.968,-149.86 -86.538,-149.86 ; -97.754,-134.488 -86.324,-134.488 ; -95.936,-147.828 -95.301,-149.86 ; -95.849,-136.52 -95.214,-134.488 ; -95.301,-145.283 -95.301,-149.86 ; -95.215,-139.065 -95.215,-134.488 ; -94.666,-147.828 -95.301,-149.86 ; -94.579,-136.52 -95.214,-134.488 ; -83.149,-143.398 -79.339,-139.588 ; -83.149,-142.128 -80.609,-139.588 ; -83.149,-140.858 -81.879,-139.588 ; -81.879,-144.668 -76.799,-139.588 ; -80.609,-144.668 -75.529,-139.588 ; -79.339,-144.668 -74.259,-139.588 ; -76.799,-144.668 -71.719,-139.588 ; -75.529,-144.668 -70.449,-139.588 ; -74.259,-144.668 -69.179,-139.588 ; -72.989,-144.668 -67.909,-139.588 ; -72.989,-139.588 -78.069,-144.668 ; -71.719,-144.668 -66.639,-139.588 ; -70.449,-144.668 -65.369,-139.588 ; -69.179,-144.668 -64.099,-139.588 ; -67.909,-144.668 -62.829,-139.588 ; -66.639,-144.668 -61.559,-139.588 ; -65.369,-144.668 -60.289,-139.588 ; -64.099,-144.668 -59.019,-139.588 ; -62.829,-144.668 -57.749,-139.588 ; -61.559,-144.668 -56.479,-139.588 ; -60.289,-144.668 -55.209,-139.588 ; -59.019,-144.668 -53.939,-139.588 ; -57.749,-144.668 -52.669,-139.588 ; -56.479,-144.668 -52.669,-140.858 ; -55.209,-144.668 -52.669,-142.128 ; -53.939,-144.668 -52.669,-143.398 ; -52.669,-154.828 -52.669,-149.748 ; -52.669,-130.698 -52.669,-134.508 ; -52.669,-129.428 -52.669,-134.508 ; -83.149,-144.668 -83.149,-139.588 -78.069,-139.588 ; -83.149,-144.668 -52.669,-144.668 ; -83.149,-144.668 -78.069,-139.588 ; -78.069,-144.668 -52.669,-144.668 ; -78.069,-144.668 -78.069,-149.748 -52.669,-149.748 ; -78.069,-139.588 -78.069,-134.508 ; -78.069,-139.588 -52.669,-139.588 ; -78.069,-134.508 -52.669,-134.508 ; -78.069,-134.508 -52.669,-134.508 ; -52.669,-149.748 -52.669,-144.668 ; -52.669,-144.668 -52.669,-139.588 ; -52.669,-139.588 -52.669,-134.508
  lines w0.25: -310.769,130.515 -126.769,130.515 ; -310.73,102.441 -146.218,102.441 -146.218,130.441 ; -310.73,116.441 -146.218,116.441 ; -310.73,123.441 -146.23,123.441 ; -298.73,102.441 -298.73,123.441 ; -277.48,102.441 -277.48,123.441 ; -187.344,102.441 -187.344,123.379 ; -172.23,102.441 -172.23,123.441 ; -159.23,102.441 -159.23,123.441 ; -147.353,109.441 -310.73,109.441 -146.218,109.441 ; -140.959,-255.365 251.041,-255.365 ; -45.769,-255.157 -45.769,-216.157 ; -45.769,-236.157 -10.019,-236.157 ; -45.769,-229.507 -10.019,-229.507 ; -45.769,-223.807 66.037,-223.807 ; -45.769,-216.188 251.138,-216.188 ; 251.044,-255.365 251.044,-216.465
  lines w0.254: -317.831,-158.992 -310.831,-158.992 ; -317.831,34.008 -310.831,34.008 ; -247.164,-262.492 -247.164,-255.492 ; -247.164,130.508 -247.164,137.508 ; -176.331,-262.492 -176.331,-255.492 ; -176.331,130.508 -176.331,137.508 ; -105.581,-262.492 -105.581,-255.492 ; -105.581,130.508 -105.581,137.508 ; -10.019,-255.157 -10.019,-223.807 ; -10.019,-247.757 163.831,-247.757 ; 45.919,-262.492 45.919,-255.492 ; 45.919,130.508 45.919,137.508 ; 66.037,-255.157 66.037,-216.157 ; 106.669,-262.492 106.669,-255.492 ; 106.669,130.508 106.669,137.508 ; 163.738,-255.188 163.738,-216.188 ; 163.738,-243.788 251.138,-243.788 ; 163.738,-225.288 251.138,-225.288 ; 177.419,-262.492 177.419,-255.492 ; 177.419,130.508 177.419,137.508 ; 192.138,-255.188 192.138,-243.788 ; 237.648,-255.188 237.648,-243.788 ; 251.169,-158.992 258.169,-158.992 ; 251.169,34.008 258.169,34.008 ; -310.831,-255.492 -310.831,130.508 251.169,130.508 251.169,-255.492 -310.831,-255.492
  text "4" at 7.369,132.008 h4.5
  text "3" at 75.769,132.008 h4.5
  text "2" at 140.869,132.008 h4.5
  text "1" at 211.169,131.908 h4.5
  text "7" at -211.831,131.708 h4.5
  text "5" at -67.031,131.708 h4.5
  text "8" at -281.531,131.408 h4.5
  text "6" at -139.831,131.408 h4.5
  text "REVISION RECORD" at -247.23,125.441 h3
  text "REV" at -309.23,118.941 h3
  text "DATE" at -293.23,118.941 h3
  text "REMARKS" at -242.23,118.941 h3
  text "CHK" at -170.23,118.941 h3
  text "ENG" at -157.73,118.941 h3
  text "BY" at -183.14,118.908 h3
  text "01" at -306.55,111.841 h3
  text "Mar 13" at -295.108,111.841 h3
  text "SK" at -183.14,111.415 h3
  text "SK" at -168.802,111.415 h3
  text "SK" at -156.545,111.415 h3
  text "02" at -306.55,104.841 h3
  text "May 13" at -295.58,104.841 h3
  text "SK" at -183.14,104.303 h3
  text "SK" at -168.802,104.303 h3
  text "SK" at -156.545,104.303 h3
  text "D" at -317.48,84.422 h4.5
  text "D" at 253.785,84.091 h4.5
  text "NOTES:" at -307.016,82.47 h3.17
  text "1. THIS FAB DRAWING SHALL BE USED WITH FILM:" at -306.916,74.439 h3.17
  text "ONLY" at -296.911,69.62 h3.17
  text ".Pcb_File_Name_No_Path" at -281.356,69.469 h3.17
  text "ARTWORK PACKAGE CONTAINS 9 SHEETS OF FILM." at -296.911,64.439 h3.17
  text "2.  MATERIAL:" at -307.583,55.106 h3.17
  text "LAMINATE MATERIAL FOR THIS BOARD" at -236.958,50.223 h3.17
  text "BASE MATERIAL:" at -297.423,50.128 h3.17
  text "SHALL MEET THE REQUIREMENTS OF" at -236.958,45.321 h3.17
  text "IPC-4101 A/24, 26, 28 OR 98 AND" at -236.958,40.241 h3.17
  text "THE FOLLOWING REQUIREMENTS:" at -236.958,35.11 h3.17
  text "Er = 4.8 MAXIMUM," at -236.958,29.725 h3.17
  text "Tg = 175 DEGREES C MINIMUM, AND" at -236.958,24.366 h3.17
  text "T260 (IPC-TM-650) = 260 DEGREES C FOR" at -236.958,19.286 h3.17
  text "30 MINS. MATERIAL SELECTION EXAMPLES" at -236.958,14.155 h3.17
  text "INCLUDE ISOLA FR408 OR IS410, NELCO" at -236.958,8.77 h3.17
  text "N4000-11 AND POLYCLAD PCL-FR-370HR;" at -236.958,3.411 h3.17
  text "OTHER EXAMPLES MAY QUALIFY." at -237.276,-1.587 h3.17
  text "BASE COLOUR:" at -297.424,-6.896 h3.17
  text "NATURAL" at -236.869,-6.896 h3.17
  text "C" at -317.48,-10.752 h4.5
  text "C" at 254.395,-11.235 h4.5
  text "COPPER WEIGHT:" at -297.424,-11.896 h3.17
  text "305 G/SQ M (1 OZ/SQ FT) UNLESS SHOWN" at -236.865,-11.896 h3.17
  text "OTHERWISE IN DETAIL A" at -236.869,-16.896 h3.17
  text "FINISHED THICKNESS:" at -297.424,-21.896 h3.17
  text "SEE DETAIL A" at -236.869,-21.896 h3.17
  text "LAYER ARRANGEMENT:" at -297.424,-26.896 h3.17
  text "SEE DETAIL A" at -236.869,-26.896 h3.17
  text "DIELECTRIC THICKNESS:" at -297.424,-31.896 h3.17
  text "0.100 (.0039) MINIMUM UNLESS SHOWN" at -236.869,-31.896 h3.17
  text "OTHERWISE IN DETAIL A" at -236.869,-36.896 h3.17
  text "3. PLATING:" at -307.424,-46.896 h3.17
  text "IMMERSION GOLD (GOLD OVER ELECTROLESS NICKEL)." at -297.424,-51.896 h3.17
  text "GOLD:" at -297.424,-56.896 h3.17
  text "0.00005 (.000002) MINIMUM / 0.00025(.000010) MAXIMUM" at -267.424,-56.896 h3.17
  text "NICKEL:" at -297.424,-61.896 h3.17
  text "0.0025 (.00010) MINIMUM / 0.013 (.0005) MAXIMUM" at -267.424,-61.896 h3.17
  text "4. PROCESS:" at -307.424,-71.896 h3.17
  text "BOARDS SHALL HAVE SOLDER MASK OVER BARE COPPER (SMOBC)." at -297.424,-76.896 h3.17
  text "5. SOLDER MASK:" at -307.424,-86.896 h3.17
  text "A LIQUID PHOTOIMAGEABLE (LPI) SOLDER MASK SHALL BE APPLIED ON" at -297.424,-91.896 h3.17
  text "BOTH SIDES, COLOUR : BLACK. REGISTRATION TO TRUE POSITION SHALL" at -297.424,-96.896 h3.17
  text "BE +/- 0.08(+/-.003)." at -297.424,-101.896 h3.17
  text "6. LEGEND:" at -307.424,-111.896 h3.17
  text "REGISTRATION OF COMPONENT LEGEND TO TRUE POSITION SHALL BE" at -297.424,-116.896 h3.17
  text "B" at -317.48,-117.331 h4.5
  text "B" at 254.928,-117.458 h4.5
  text "+/- 0.25 (+/- .010). COLOUR: WHITE." at -297.424,-121.896 h3.17
  text "7. ALL HOLES SHALL BE DRILLED TO TRUE POSITION +/- 0.08 (+/- .003)." at -307.424,-131.896 h3.17
  text "LAYER 1 (COPPER TOP, 1 OZ. MINIMUM)" at -46.319,-138.699 h3.25
  text "8. THE DESIGN MINIMUM CONDUCTOR WIDTH IS 0.2MM." at -307.423,-141.896 h3.17
  text "1.6mm" at -102.413,-143.383 h3.25
  text "DIELECTRIC MATERIAL" at -46.319,-143.779 h3.25
  text "THE DESIGN MINIMUM CONDUCTOR SPACING IS 0.2MM." at -298.731,-146.949 h3.17
  text "LAYER 2 (COPPER BOTTOM, 1 OZ. MINIMUM)" at -46.533,-148.717 h3.25
  text "9.  THIS AREA IS FOR MANUFACTURER'S ID/UL CODE AND DATE CODE. IT" at -307.424,-156.896 h3.17
  text "SHALL APPEAR IN APPROXIMATELY THE POSITION SHOWN ON THE" at -297.424,-161.896 h3.17
  text "SOLDER SIDE ONLY." at -297.424,-166.896 h3.17
  text "10. THIS PART MUST BE COMPLIANT WITH EU DIRECTIVE" at -307.424,-179.842 h3.17
  text "DETAIL A" at -64.265,-185.457 h4.06
  text "2002/95/EC (RoHS). USE ONLY RoHS COMPLIANT MATERIALS" at -297.424,-185.477 h3.17
  text ".LEGEND" at 86.245,-187.571 h2.03
  text "2. FINISHED MATERIAL THICKNESS" at -81.106,-191.553 h3.17
  text "AND FINISHES." at -297.424,-191.827 h3.17
  text "11. ADJUST TRACE WIDTH AND/OR DIELECTRIC THICKNESS" at -307.197,-202.067 h3.17
  text "TO ACCOMPLISH THE FOLLOWING CONTROLLED IMPEDANCE" at -297.477,-208.184 h3.17
  text "A" at -312.679,-214.938 h4.5
  text "A" at 254.217,-214.938 h4.5
  text "SINGLE ENDED SIGNALS ON EXTERNAL LAYERS 0.43MM TRACK" at -296.87,-217.166 h3.17
  text "CONFIDENTIALITY NOTICE: THIS DOCUMENT (INCLUDING ALL" at 67.187,-220.607 h2.1
  text "DO NOT SCALE DRAWING" at -29.519,-222.407 h4.5
  text "LX DESIGN HOUSE" at 165.55,-222.928 h4.32
  text "TO BE 50 OHM IMPEDANCE." at -296.869,-223.338 h3.17
  text "INFORMATION CONTAINED THEREIN) IS OWNED BY LX INNOVATIONS" at 67.187,-224.357 h2.1
  text "TOLERANCES UNLESS OTHERWISE STATED" at -7.519,-227.782 h2.25
  text "AND MUST BE KEPT IN CONFIDENCE AND USED SOLELY FOR" at 67.187,-227.857 h2.1
  text "SCALE" at -44.769,-227.907 h2.5
  text "1 : 1" at -25.019,-227.907 h2.5
  text "TITLE" at 165.05,-230.428 h3
  text "THE OWNER'S SPECIFIED PURPOSES. IT'S CONTENT MAY" at 67.187,-231.357 h2.1
  text "MILLIMETERS" at 18.981,-231.907 h2
  text "THIRD ANGLE" at -39.519,-232.407 h2
  text "ALSO BE COVERED BY PATENTS. THIS DOCUMENT" at 67.187,-234.857 h2.1
  text "PROJECTION" at -38.769,-235.407 h2
  text "+" at 47.341,-235.937 h2
  text "PCB FABRICATION:" at 165.05,-236.428 h4
  text "DIMS. TO 1 DEC PLACE" at 0.731,-236.657 h2
  text "0.2" at 49.231,-236.657 h2
  text "-" at 47.341,-237.277 h2
  text "MUST NOT BE COPIED OR REPRODUCED, NOR DIVULGED" at 67.187,-238.357 h2.1
  text "+" at 47.341,-240.187 h2
  text "FILENAME:" at -44.269,-240.407 h2.5
  text "DIMS. TO 2 DEC PLACES" at 0.731,-240.907 h2
  text "0.10" at 49.231,-240.907 h2
  text "-" at 47.341,-241.527 h2
  text "IN WHOLE OR IN PART WITHOUT THE OWNER'S PRIOR" at 67.187,-241.857 h2.1
  text ".Pcb_File_Name_No_Path" at 165.214,-242.137 h4
  text "+" at 47.341,-244.437 h2
  text "WRITTEN CONSENT." at 67.187,-245.107 h2.1
  text "DIMS. WITHOUT DEC PLACE" at 0.731,-245.157 h2
  text "0.4" at 49.231,-245.157 h2
  text "-" at 47.341,-245.777 h2
  text ".Pcb_File_Name_No_Path" at -41.652,-246.918 h1.68
  text "REV" at 240.888,-247.438 h2.5
  text "ALL DIMENSIONS ARE IN MILLIMETERS" at 66.834,-250.585 h2.1
  text "+" at 26.341,-251.437 h2
  text "SHEET" at 164.638,-251.438 h2.5
  text "1 OF 1" at 178.638,-251.438 h2.5
  text ".Pcb_File_Name_No_Path" at 193.374,-251.795 h3.5
  text "ANGULAR" at 9.231,-252.157 h2
  text "0" at 30.731,-252.157 h2
  text "30'" at 38.231,-252.157 h2
  text "-" at 26.341,-252.777 h2
  text "1.0." at 239.527,-253.842 h5.5
  text "ALL FINISHED DIMENSIONS ARE AFTER PLATING AND PAINTING" at 66.834,-254.141 h2.1
  text "8" at -282.131,-260.992 h4.5
  text "1" at 211.669,-260.992 h4.5
  text "5" at -67.731,-261.192 h4.5
  text "4" at 8.269,-261.192 h4.5
  text "3" at 75.769,-261.192 h4.5
  text "2" at 140.769,-261.192 h4.5
  text "6" at -140.431,-261.392 h4.5
  text "7" at -212.231,-261.592 h4.5

## Text inside footprints (layer, text, board x,y; h text height)
Designator33: Top Overlay "Ninjablocks.com" at 0.931,23.858 h0.75 r270
J1: Top Overlay "1" at 23.876,14.478 h1.27 r270; Top Overlay "6" at 18.796,22.733 h1.27 r270